# Altium PCB IMX219_Bridge.PcbDoc
Units mil, origin at the board's own origin, x right, y up, seen from the top; angles counter-clockwise.
Board outline 1639 x 1636 mil, 2 copper layers (Top Layer, Bottom Layer); 42 components, 36 nets, 198 pads, 212 vias.
Unrouted connection lines stored in the file: 2.
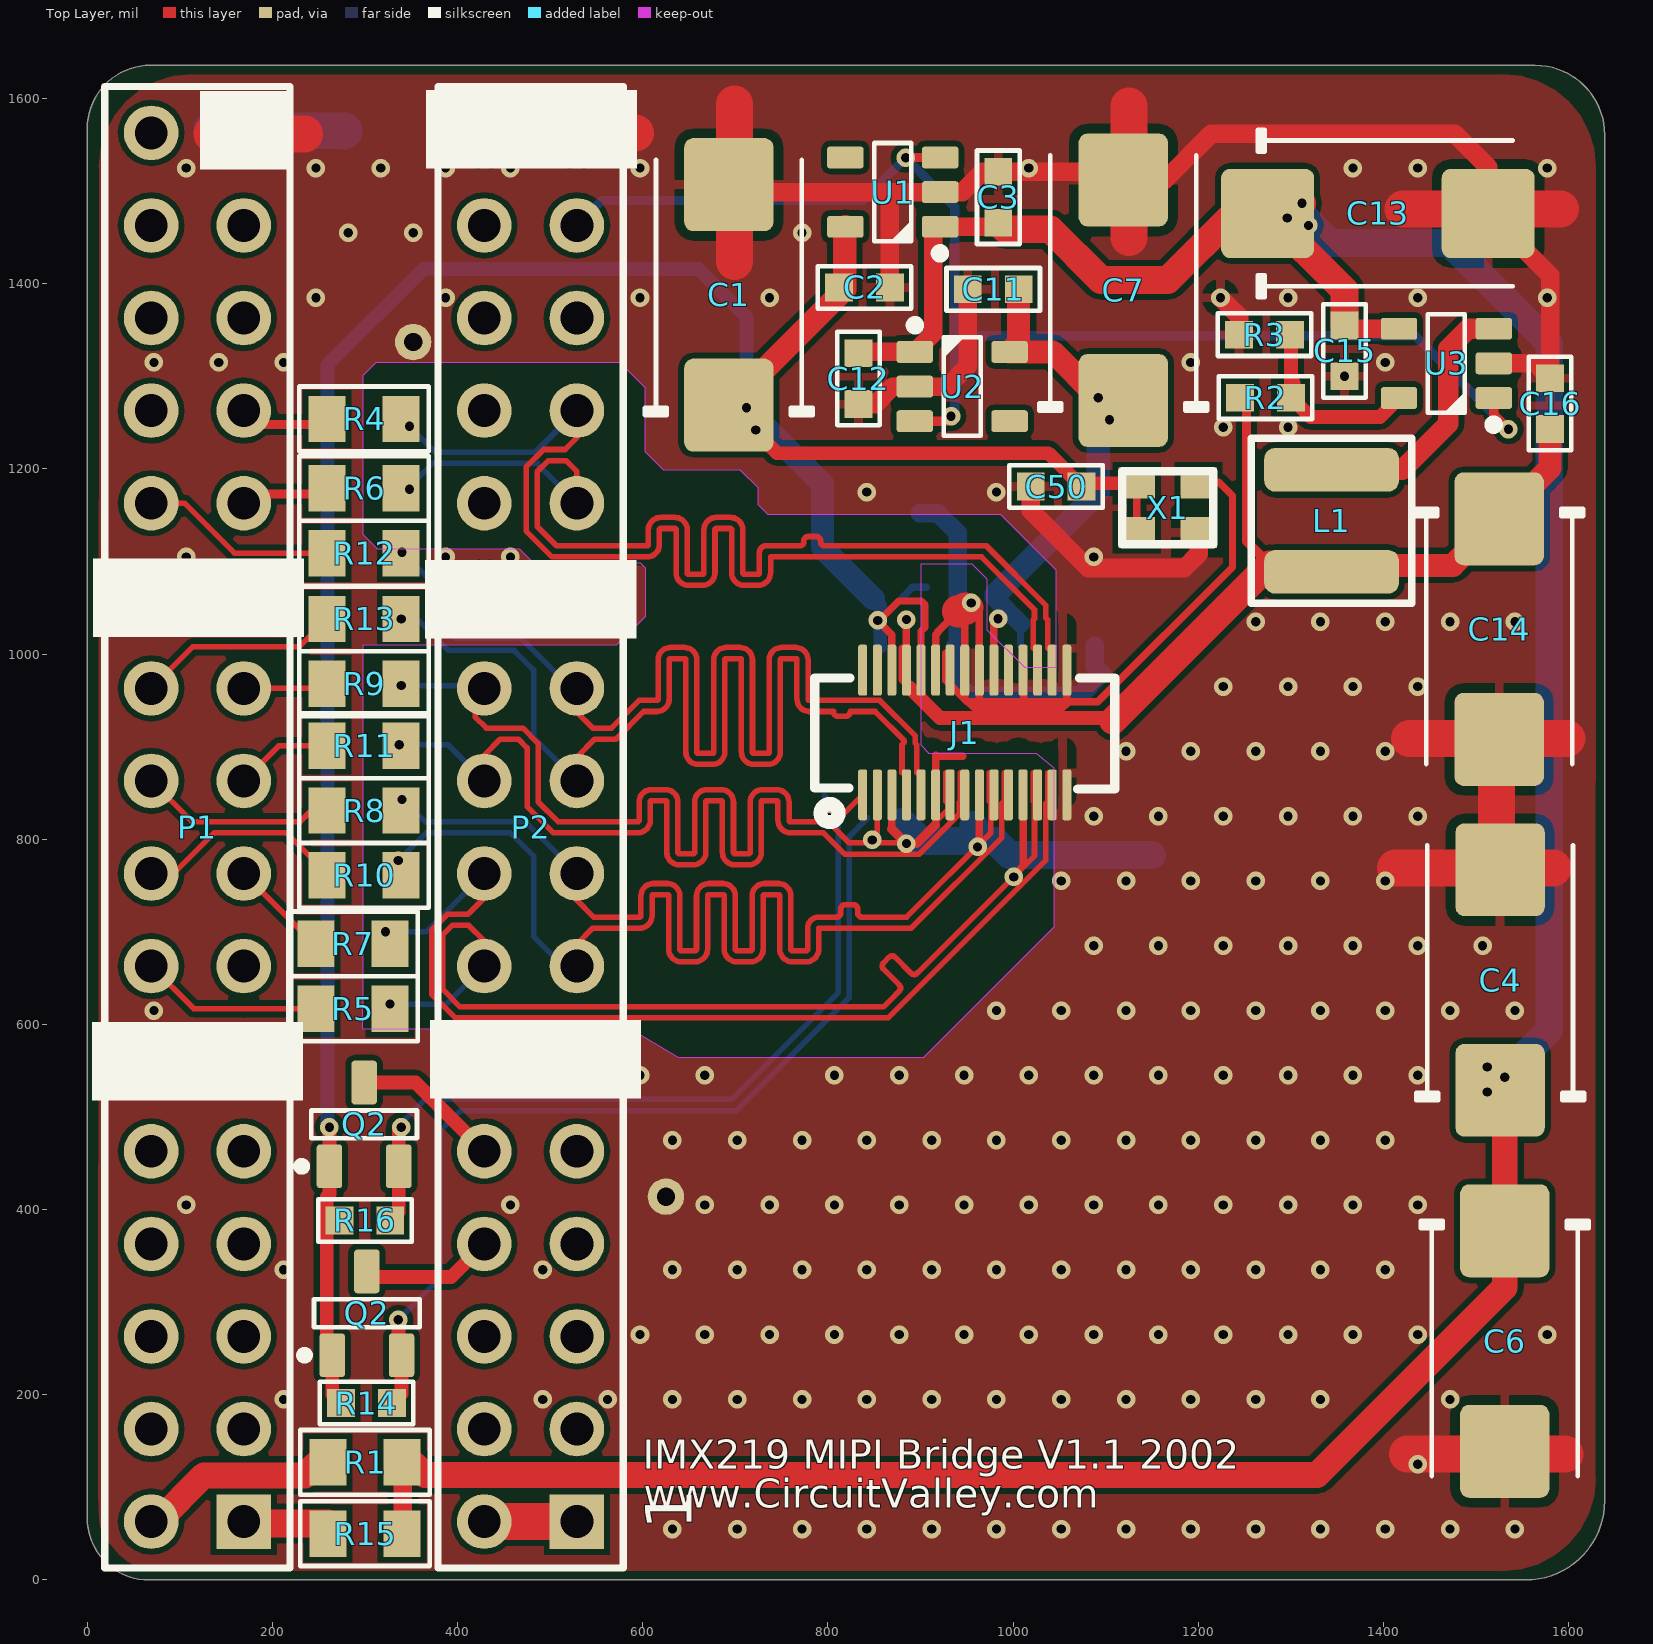
[diagram p0: Top Layer view]
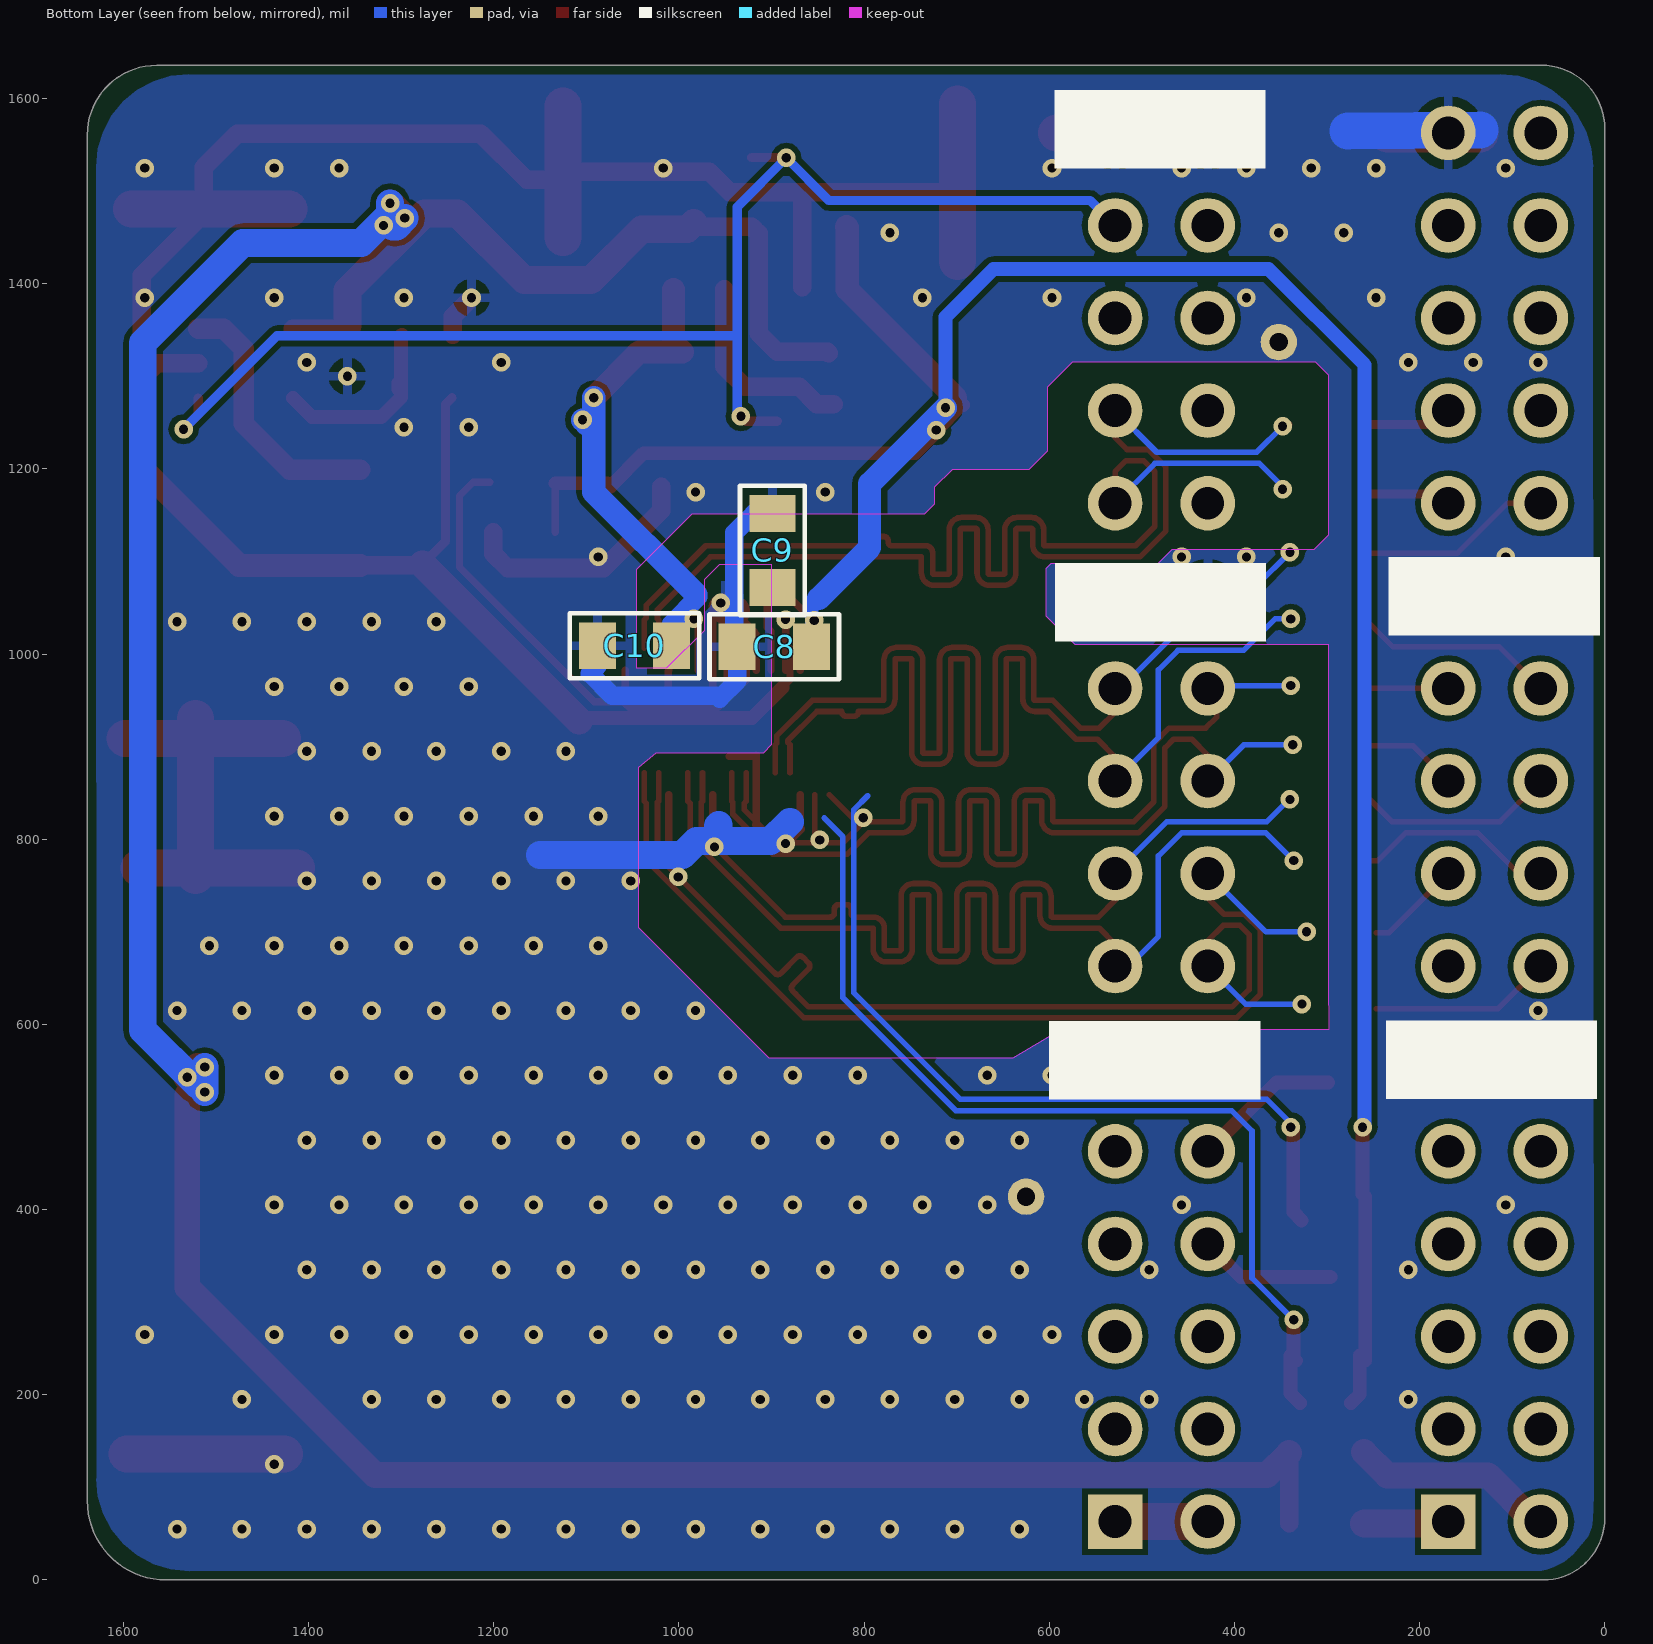
[diagram p1: Bottom Layer view, seen from below]

## Layer stack, top to bottom
Top Solder: solder mask 0.4, Solder Resist, Dk 3.5
Top Layer: signal copper 1.4
Dielectric 1: dielectric 12.6, FR-4, Dk 4.8
Bottom Layer: signal copper 1.4
Bottom Solder: solder mask 0.4, Solder Resist, Dk 3.5

## Board outline
0,66.57 0,1567.86 cw(c68.14,1567.86) 68.14,1636 1563.92,1636 cw(c1563.92,1560.92) 1639,1560.92 1639,85.36 cw(c1553.64,85.36) 1553.64,0 66.57,0 cw(c66.57,66.57)

## Design rules (kind name [scope] priority, off if disabled: settings)
Clearance [All] p1: gap=6 ignorepadtopadclearanceinfootprint=FALSE except(0: Arc-Hole Track-Hole SMDPad-Hole THPad-Hole Via-Hole Fill-Hole Poly-Hole Region-Hole Text-Hole)
DiffPairsRouting [All] p1: maxlimit=10 minlimit=6 mostfreqgap=6 toplayer_minwidth=6 toplayer_maxwidth=15 toplayer_prefwidth=6 bottomlayer_minwidth=6 bottomlayer_maxwidth=15 bottomlayer_prefwidth=6 maxuncoupledlength=500
MatchedLengths MIPI2 [InNetClass('MIPI_2S')] p1: tolerance=5 checknetsindiffpair=TRUE checkdiffpairvsdiffpair=FALSE checkxsignals=FALSE checkothers=FALSE
MatchedLengths MIPI [InNetClass('MIPI')] p2: tolerance=5 checknetsindiffpair=TRUE checkdiffpairvsdiffpair=FALSE checkxsignals=FALSE checkothers=FALSE
PolygonConnect [All] p1: connectstyle=Relief reliefconductorwidth=10 reliefentries=4 polygonreliefangle="90 Angle" airgapwidth=10
RoutingVias [All] p1: holewidth=11.81 width=24 viastyle="Through Hole" minholewidth=10 minwidth=20 maxholewidth=196.85 maxwidth=250
SolderMaskExpansion [All] p1: expansion=4 istentingtop=FALSE
Width [All] p1: maxlimit=500 minlimit=6 preferedwidth=10
29 further rules are at their usual default settings.

## Classes and differential pairs
differential pair class MIPI_DIFF: CLK D0 D1 D2 D3
net class MIPI: CLK_N CLK_P D0_N D0_P D1_N D1_P D2_N D2_P D3_N D3_P
differential pair D0: +D0_P -D0_N
differential pair D3: +D3_P -D3_N
differential pair D2: +D2_P -D2_N
differential pair D1: +D1_P -D1_N
differential pair CLK: +CLK_P -CLK_N

## Components (designator, comment, footprint, x,y, rotation, side; value= is the part's Value field where it differs from the comment)
C1 "33uf 20V D" CAPMP7343X310N 693,1388.01 r90 top
C2 "100nf" 0603C-GENERIC 867,1396 r180 top
C3 "100nf" 0603C-GENERIC 984,1521 r270 top
C4 "33uf 20V D" CAPMP7343X310N 1526,648 r90 top
C6 "33uf 20V D" CAPMP7343X310N 1531,258 r270 top
C7 "33uf 20V D" CAPMP7343X310N 1119,1393.01 r90 top
C8 "1uf" 0805C-TBD 867,1008 r0 bottom
C9 "1uf" 0805C-TBD 899,1082 r90 bottom
C10 "1uf" 0805C-TBD 1018,1009 r0 bottom
C11 "100nf" 0603C-GENERIC 951,1394 r0 top
C12 "100nf" 0603C-GENERIC 833,1270 r90 top
C13 "33uf 20V D" CAPMP7343X310N 1394,1476.01 r0 top
C14 "33uf 20V D" CAPMP7343X310N 1525,1027 r270 top
C15 "100nf" 0603C-GENERIC 1358,1300 r90 top
C16 "100nf" 0603C-GENERIC 1580,1298 r270 top
C50 "100nf" 0603C-GENERIC 1019,1181 r0 top
J1 "DF37NC-30DS-0.4V" DF37NC-30DS-0.4V 947.76,915.32 r0 top
L1 "2u2" TAIYO_NRS4018T2R2MDGJ 1344,1144 r270 top
P1 "Header 16X2" HDR2X16 169,63 r90 top
P2 "Header 16X2" HDR2X16 528.84,63.01 r90 top
Q2 "NTR5103NT1G" SOT23-3 302,288 r90 top
Q2 "NTR5103NT1G" SOT23-3 299,492 r90 top
R1 "0R" 0805R-0R1 270,127 r0 top
R2 "300K" 0603R-10K 1300,1277 r180 top
R3 "73K2" 0603R-10K 1244,1345 r0 top
R4 "50R" 0805R-0R1 269,1254 r0 top
R5 "50R" 0805R-0R1 257,617 r0 top
R6 "50R" 0805R-0R1 269,1179 r0 top
R7 "50R" 0805R-0R1 317,687 r180 top
R8 "50R" 0805R-0R1 269,831 r0 top
R9 "50R" 0805R-0R1 269,968 r0 top
R10 "50R" 0805R-0R1 269,761 r0 top
R11 "50R" 0805R-0R1 269,901 r0 top
R12 "50R" 0805R-0R1 269,1109 r0 top
R13 "50R" 0805R-0R1 269,1038 r0 top
R14 "3K3" 0603R-10K 329,191 r180 top
R15 "0R" 0805R-0R1 270,50 r0 top
R16 "3K3" 0603R-10K 272.36,388.35 r0 top
U1 "MIC550x" SOT23-5 870,1499.01 r180 top
U2 "MIC550x" SOT23-5 945,1289.01 r0 top
U3 "AP3417C" SOT23-5 1468,1314.01 r180 top
X1 "DSO221SR" "Active Oscillator 2520" 1167,1158 r0 top

## Footprints (in the part's own frame and the unit in brackets; to place one, negate y for a bottom-side part, rotate by r counter-clockwise, add the part's x,y. Pads: shape width x height; smd on the part's side, far side on the other; paste and mask are expansions set on the pad)
0603C-GENERIC [mil] "CAPACITOR 0603"
  rect 30x30 smd: 1(0,0) 2(55,0)
  silkscreen extent -23,-23 78,23, body extent -4,-15 59,15, height 19
0603R-10K [mil] "RESISTOR 0603"
  rect 30x30 smd: 1(0,0) 2(55,0)
  silkscreen extent -23,-23 78,23, body extent -4,-15 59,15, height 20
0805C-TBD [mil] "CAPACITOR 0805"
  rect 40x50 smd: 1(-10,0) 2(70,0)
  silkscreen extent -40,-35 100,35, body extent -11,-25 70,25, height 26
0805R-0R1 [mil] "RESISTOR 0805"
  rect 40x50 smd: 1(-10,0) 2(70,0)
  silkscreen extent -40,-35 100,35, body extent -11,-25 70,25, height 27
"Active Oscillator 2520" [mm]
  rect 1x0.85 smd: 1(-0.85,-0.675) 2(0.85,-0.675) 3(0.85,0.675) 4(-0.85,0.675)
  silkscreen extent -1.25,-1 1.25,1, body extent -1.25,-1 1.25,1, height 0.56
CAPMP7343X310N [mm] "Molded body capacitor, Body 7.3x4.3mm, 2917, IPC Nominal settings"
  round 1 on Mech14: 0(0,0)
  rrect20% 2.55x2.45 smd: 1(-3.025,0) 2(3.025,0)
  silkscreen extent -3.3,-2.3 3.7,2.3, body extent -3.8,-1.97 3.8,1.98, height 3.1
DF37NC-30DS-0.4V [mm] "IMX219 Camera connector"
  rrect50% 0.247x1.4 smd: 1(-2.8,-1.71) 2(-2.4,-1.71) 3(-2,-1.71) 4(-1.6,-1.71) 5(-1.2,-1.71) 6(-0.8,-1.71) 7(-0.4,-1.71) 8(0,-1.71) 9(0.4,-1.71) 10(0.8,-1.71) 11(1.2,-1.71) 12(1.6,-1.71) 13(2,-1.71) 14(2.4,-1.71) 15(2.8,-1.71) 16(2.8,1.71) 17(2.4,1.71) 18(2,1.71) 19(1.6,1.71) 20(1.2,1.71) 21(0.8,1.71) 22(0.4,1.71) 23(0,1.71) 24(-0.4,1.71) 25(-0.8,1.71) 26(-1.2,1.71) 27(-1.6,1.71) 28(-2,1.71) 29(-2.4,1.71) 30(-2.8,1.71)
  silkscreen extent -4.11,-2.46 4.11,1.5, body extent -4.11,-1.5 4.11,1.48, height 0.99
HDR2X16 [mm] "Connector; Header; 16x2 Position"
  rect 1.5x1.5 hole 0.9: 1(0,0)
  round 1.5 hole 0.9: 2(0,2.54) 3(2.54,0) 4(2.54,2.54) 5(5.08,0) 6(5.08,2.54) 7(7.62,0) 8(7.62,2.54) 9(10.16,0) 10(10.16,2.54) 11(12.7,0) 12(12.7,2.54) 13(15.24,0) 14(15.24,2.54) 15(17.78,0) 16(17.78,2.54) 17(20.32,0) 18(20.32,2.54) 19(22.86,0) 20(22.86,2.54) 21(25.4,0) 22(25.4,2.54) 23(27.94,0) 24(27.94,2.54) 25(30.48,0) 26(30.48,2.54) 27(33.02,0) 28(33.02,2.54) 29(35.56,0) 30(35.56,2.54) 31(38.1,0) 32(38.1,2.54)
  silkscreen extent -1.27,-1.27 39.37,3.81
SOT23-3 [mm] "SOT23, 3 pin"
  round 0.5 on Mech14: 0(0,0)
  rrect25% 1.2x0.7 smd: 1(-1.15,0.95) 2(-1.15,-0.95) 3(1.15,0)
  silkscreen extent -1.25,-1.45 0.38,1.81, body extent -1.4,-1.45 1.4,1.45, height 1.29
SOT23-5 [mm]
  round 0.5 on Mech14: 0(0,0)
  rrect25% 1x0.6 smd: 1(-1.3,0.95) 2(-1.3,0) 3(-1.3,-0.95) 4(1.3,-0.95) 5(1.3,0.95)
  silkscreen extent -1.42,-1.35 0.51,1.81, body extent -1.4,-1.45 1.4,1.45, height 1.44
TAIYO_NRS4018T2R2MDGJ [mm] "TAIYO"
  rrect50% 1.2x3.7 smd: 1(-1.4,0) 2(1.4,0)
  silkscreen extent -2.26,-2.2 2.26,2.2, body extent -1.5,-1.5 1.5,1.5, height 1.35

## Part data
C1 C4 C6 C7 C13 C14: library part CAPT_330u_2917_6V3, "Capacitor SMD Tant 330uF 20% 6V3 2917"
C2 C3 C11 C12 C15 C16 C50: library part 0603C-10UF-6V3-X5R-MUR, "CAPACITOR 0603 CERAMIC"
C8 C9 C10: library part 0805C-TBD, "CAPACITOR 0805 CERAMIC VALUE TO BE DETERMINED"
J1: library part 30_Pin_Dual
L1: library part inductor_smd
P1 P2: "Header, 16-Pin, Dual row"
Q2 Q2: library part MOSFET_BSS123, "MOSFET SMD N-CH 100V 170mA SOT23-3"
R1 R4 R5 R6 R7 R8 R9 R10 R11 R12 R13 R15: library part 0805R-0R1, "RESISTOR 0805 1 WATT"
R2 R3 R14 R16: library part 0603R-10K, "GENERIC RESISTOR 0603"
X1: library part Oscillator_2520, "Active Oscillator_2520"

## Free pads (board coordinates)
  round 39.37 hole 19.68 unplated: 1(352,1337) 1(625,414)

## Via types
v1: diameter 20, hole 10, Top Layer to Bottom Layer, tented both sides, 212 vias

## Nets (pads, with @x,y where several pads share a name; then routed paths per layer and width w, separated by ;. In a path a pad name is that pad's centre, name@x,y a point inside that pad or via, vN(x,y) a via of type N, cw(c..) or ccw(c..) an arc to the next point about the centre after c; other vN are vias at no path point)
1V2: C9.1 C14.1 C16.2 J1.27 L1.2 R2.2 | length 1187.6
  Top Layer w8: J1.27@880.01,1006.33 880.01,971.99 J1.27@888,964 ; J1.27 v1(884.77,1037.32)
  Top Layer w10: R2.2 1252,1270 1252,1122 L1.2@1277,1097
  Top Layer w15: J1.27@888,964 921,931 1105,931 1108,928
  Top Layer w20: L1.2@1275.89,1095.89 L1.2@1344,1095.89
  Top Layer w25: L1.2@1344,1095.89 1474.8,1095.89 C14.1 1580,1201.09 C16.2
  Top Layer w30: 1108,928 L1.2@1277,1097
  Bottom Layer w8: C9.1@880.01,1061.01 891,1072 C9.1@906,1072
1V8: C1.1 C2.2 C8.1 C50.2 J1.26 J1.28 Q2.1 R14.2 R16.1 U1.5 X1.1 X1.4 | length 3025
  Top Layer w8: J1.28 869.02,1021.06 v1(853.76,1036.31) 855.48,1036.31 876.49,1057.32 900.76,1057.32 904.77,1053.31 904.77,1029.04 900.52,1024.79 J1.26 ; X1.1 X1.4
  Top Layer w15: Q2.1@258.6,236.72 258.6,413.72 261.6,416.72 261.6,446.72 v1(261.6,489) ; Q2.1@264.6,242.72 264.6,200.4 R14.2 ; C1.1 695.09,1268.91 v1(722,1242) ; C1.1@720.96,1240.96 744.91,1217 1038,1217 C50.2 1077.57,1184.57 X1.4
  Top Layer w25: C1.1@701.04,1276.96 818.09,1394.01 818.09,1460.88 U1.5
  Bottom Layer w15: v1@259.6,489 259.6,1312.6 363,1416 660,1416 712,1364 v1(712,1266) ; 849,1060 856.51,1052.49 856.51,1008.49 C8.1
  Bottom Layer w25: v1(712,1266) 794,1184 794,1115 849,1060
2V8: C7.1 C10.1 C11.2 J1.21 U2.5 | length 625.3
  Top Layer w8: J1.21 979.26,1033.81 v1(983.76,1038.31)
  Top Layer w25: C11.2 1006,1336.23 U2.5 1042.59,1326.41 v1(1092,1277)
  Bottom Layer w8: 981.5,1064.5 1008,1038 1008,1033 C10.1
  Bottom Layer w20: 979,1062 C10.1@1008,1033
  Bottom Layer w25: 981.5,1064.5 1092,1175 1092,1248 ; v1(1092,1277) 1092,1248 ; v1(1104,1253) 1099,1248 1092,1248
CLK_N: J1.5 P2.19 R12.2 | length 1272.9
  Top Layer w6: R12.2 v1(340,1110) ; P2.19 528.84,937.16 545.99,920.01 566.03,920.01 596.03,950.01 615.01,950.01 ccw(c615.01,951.51) 616.51,951.51 616.51,993.71 cw(c630.01,993.71) 630.01,1007.21 645.01,1007.21 cw(c645.01,993.71) 658.51,993.71 658.51,894.31 ccw(c660.01,894.31) 660.01,892.81 675.01,892.81 ccw(c675.01,894.31) 676.51,894.31 676.51,993.71 cw(c690.01,993.71) 690.01,1007.21 705.01,1007.21 cw(c705.01,993.71) 718.51,993.71 718.51,894.31 ccw(c720.01,894.31) 720.01,892.81 735.01,892.81 ccw(c735.01,894.31) 736.51,894.31 736.51,993.71 cw(c750.01,993.71) 750.01,1007.21 765.01,1007.21 cw(c765.01,993.71) 778.51,993.71 778.51,951.51 ccw(c780.01,951.51) 780.01,950.01 855.99,950.01 894.38,911.62 894.38,903.62 895.76,902.24 J1.5@895.76,871.69
  Bottom Layer w6: v1(340,1110) 376,1074 376,1038 397,1017 469,1017 522.99,963.01 P2.19
CLK_P: J1.4 P2.17 R13.2 | length 1311.5
  Top Layer w6: P2.17 528.84,888.85 548,908.01 571,908.01 601,938.01 615.01,938.01 ccw(c615.01,951.51) 628.51,951.51 628.51,993.71 cw(c630.01,993.71) 630.01,995.21 645.01,995.21 cw(c645.01,993.71) 646.51,993.71 646.51,894.31 ccw(c660.01,894.31) 660.01,880.81 675.01,880.81 ccw(c675.01,894.31) 688.51,894.31 688.51,993.71 cw(c690.01,993.71) 690.01,995.21 705.01,995.21 cw(c705.01,993.71) 706.51,993.71 706.51,894.31 ccw(c720.01,894.31) 720.01,880.81 735.01,880.81 ccw(c735.01,894.31) 748.51,894.31 748.51,993.71 cw(c750.01,993.71) 750.01,995.21 765.01,995.21 cw(c765.01,993.71) 766.51,993.71 766.51,951.51 ccw(c780.01,951.51) 780.01,938.01 804,938.01 806,938.01 806,937.51 ccw(c810.5,937.51) 810.5,933.01 819.5,933.01 ccw(c819.5,937.51) 824,937.51 824,938.01 833,938.01 851.02,938.01 882.38,906.65 882.38,904.62 880.01,902.24 J1.4@880.01,871.69
  Bottom Layer w6: v1(339,1038) 356,1038 390,1004 461,1004 482,983 482,909.85 P2.17 P2.17@528.84,881.16
D0_N: J1.8 P2.18 R11.2 | length 1116.9
  Top Layer w6: v1(337,902) 338,902 R11.2 ; P2.18 428.84,890.85 446,908.01 465.59,908.01 475,898.59 475,835.59 503.59,807.01 594.5,807.01 ccw(c594.5,820.51) 608,820.51 608,840.12 cw(c609.5,840.12) 609.5,841.62 624.5,841.62 cw(c624.5,840.12) 626,840.12 626,785.9 ccw(c639.5,785.9) 639.5,772.4 654.5,772.4 ccw(c654.5,785.9) 668,785.9 668,840.12 cw(c669.5,840.12) 669.5,841.62 684.5,841.62 cw(c684.5,840.12) 686,840.12 686,785.9 ccw(c699.5,785.9) 699.5,772.4 714.5,772.4 ccw(c714.5,785.9) 728,785.9 728,840.12 cw(c729.5,840.12) 729.5,841.62 744.5,841.62 cw(c744.5,840.12) 746,840.12 746,820.51 ccw(c759.5,820.51) 759.5,807.01 795.03,807.01 818.03,784.01 898.6,784.01 941.63,827.04 941.63,839.75 943,841.13 J1.8@943,871.69
  Bottom Layer w6: v1(337,902) 389.85,902 P2.18
D0_P: J1.7 P2.20 R9.2 | length 1095.1
  Top Layer w6: v1(339,966) R9.2 ; P2.20 419,953.17 419,932 430.99,920.01 470.56,920.01 487,903.56 487,840.56 508.56,819.01 594.5,819.01 ccw(c594.5,820.51) 596,820.51 596,840.12 cw(c609.5,840.12) 609.5,853.62 624.5,853.62 cw(c624.5,840.12) 638,840.12 638,785.9 ccw(c639.5,785.9) 639.5,784.4 654.5,784.4 ccw(c654.5,785.9) 656,785.9 656,840.12 cw(c669.5,840.12) 669.5,853.62 684.5,853.62 cw(c684.5,840.12) 698,840.12 698,785.9 ccw(c699.5,785.9) 699.5,784.4 714.5,784.4 ccw(c714.5,785.9) 716,785.9 716,840.12 cw(c729.5,840.12) 729.5,853.62 744.5,853.62 cw(c744.5,840.12) 758,840.12 758,820.51 ccw(c759.5,820.51) 759.5,819.01 800,819.01 823,796.01 893.63,796.01 929.63,832.01 929.63,838.75 927.25,841.13 J1.7@927.25,871.69
  Bottom Layer w6: v1(339,966) 425.85,966 P2.20
D1_N: J1.11 P2.13 R10.2 | length 1310.5
  Top Layer w6: v1(336,777) R10.2@339,777 ; P2.13 528.84,686.85 546,704.01 596.5,704.01 ccw(c596.5,717.51) 610,717.51 610,738.74 cw(c611.5,738.74) 611.5,740.24 626.5,740.24 cw(c626.5,738.74) 628,738.74 628,681.28 ccw(c641.5,681.28) 641.5,667.78 656.5,667.78 ccw(c656.5,681.28) 670,681.28 670,738.74 cw(c671.5,738.74) 671.5,740.24 686.5,740.24 cw(c686.5,738.74) 688,738.74 688,681.28 ccw(c701.5,681.28) 701.5,667.78 716.5,667.78 ccw(c716.5,681.28) 730,681.28 730,738.74 cw(c731.5,738.74) 731.5,740.24 746.5,740.24 cw(c746.5,738.74) 748,738.74 748,681.28 ccw(c761.5,681.28) 761.5,667.78 776.5,667.78 ccw(c776.5,681.28) 790,681.28 790,704.01 890,704.01 987.87,801.88 987.87,838.75 990.24,841.13 J1.11@990.24,871.69
  Bottom Layer w6: v1(336,777) 366,807 457,807 482,782 482,695 513.99,663.01 P2.13
D1_P: J1.10 P2.15 R8.2 | length 1228.5
  Top Layer w6: P2.15 528.84,734.17 547,716.01 596.5,716.01 ccw(c596.5,717.51) 598,717.51 598,738.74 cw(c611.5,738.74) 611.5,752.24 626.5,752.24 cw(c626.5,738.74) 640,738.74 640,681.28 ccw(c641.5,681.28) 641.5,679.78 656.5,679.78 ccw(c656.5,681.28) 658,681.28 658,738.74 cw(c671.5,738.74) 671.5,752.24 686.5,752.24 cw(c686.5,738.74) 700,738.74 700,681.28 ccw(c701.5,681.28) 701.5,679.78 716.5,679.78 ccw(c716.5,681.28) 718,681.28 718,738.74 cw(c731.5,738.74) 731.5,752.24 746.5,752.24 cw(c746.5,738.74) 760,738.74 760,681.28 ccw(c761.5,681.28) 761.5,679.78 776.5,679.78 ccw(c776.5,681.28) 778,681.28 778,704.01 cw(c790,704.01) 790,716.01 805,716.01 809.5,716.01 ccw(c809.5,720.51) 814,720.51 814,724.84 cw(c818.5,724.84) 818.5,729.34 827.5,729.34 cw(c827.5,724.84) 832,724.84 832,720.51 ccw(c836.5,720.51) 836.5,716.01 862,716.01 885.03,716.01 975.87,806.85 975.87,839.75 974.5,841.13 J1.10@974.5,871.69
  Bottom Layer w6: v1(340,843) 341,843 365,819 472.85,819 P2.15 P2.15@517.99,763.01
D2_N: J1.14 P2.16 R7.1 | length 1148.3
  Top Layer w6: v1(322,700) 325,700 327,702 327,700 R7.1@327,699 ; P2.16 428.84,736.85 411,719.01 389.03,719.01 372,701.98 372,632.59 397.59,607.01 865,607.01 1035.11,777.12 1035.11,838.75 1037.49,841.13 J1.14@1037.49,871.69
  Bottom Layer w6: v1(322,700) 365.83,700 P2.16
D2_P: J1.13 P2.14 R5.2 | length 1128.4
  Top Layer w6: v1(327,622) R5.2@327,625 ; P2.14 428.84,690.17 412,707.01 394,707.01 384,697.01 384,637.56 402.56,619.01 860.03,619.01 874.01,632.99 877.19,636.17 ccw(c874.01,639.35) 877.19,642.54 859.8,659.93 cw(c862.98,663.11) 859.8,666.29 866.16,672.66 cw(c869.34,669.48) 872.53,672.66 889.92,655.26 ccw(c893.1,658.45) 896.28,655.26 900.01,658.99 1023.11,782.09 1023.11,839.75 1021.74,841.13 J1.13@1021.74,871.69
  Bottom Layer w6: v1(327,622) 387.83,622 P2.14
D3_N: J1.17 P2.23 R6.2 | length 1218.1
  Top Layer w6: P2.23 528.84,1197.17 517,1209.01 498,1209.01 486,1197.01 486,1138.01 507,1117.01 604.5,1117.01 ccw(c604.5,1118.51) 606,1118.51 606,1134.19 cw(c619.5,1134.19) 619.5,1147.69 634.5,1147.69 cw(c634.5,1134.19) 648,1134.19 648,1087.83 ccw(c649.5,1087.83) 649.5,1086.33 664.5,1086.33 ccw(c664.5,1087.83) 666,1087.83 666,1134.19 cw(c679.5,1134.19) 679.5,1147.69 694.5,1147.69 cw(c694.5,1134.19) 708,1134.19 708,1087.83 ccw(c709.5,1087.83) 709.5,1086.33 724.5,1086.33 ccw(c724.5,1087.83) 726,1087.83 726,1110.01 cw(c733,1110.01) 733,1117.01 765,1117.01 769.5,1117.01 ccw(c769.5,1121.51) 774,1121.51 774,1122.51 cw(c778.5,1122.51) 778.5,1127.01 787.5,1127.01 cw(c787.5,1122.51) 792,1122.51 792,1121.51 ccw(c796.5,1121.51) 796.5,1117.01 802,1117.01 971,1117.01 1035.11,1052.89 1035.11,1039.26 1037.49,1036.89 J1.17@1037.49,1006.33
  Bottom Layer w6: v1(348,1178) 348,1181 373,1206 485.85,1206 P2.23
D3_P: J1.18 P2.25 R4.2 | length 1226.5
  Top Layer w6: R4.2@340,1248 346,1248 v1(348,1246) ; P2.25 528.84,1233.85 516,1221.01 493.03,1221.01 474,1201.98 474,1133.04 502.03,1105.01 604.5,1105.01 ccw(c604.5,1118.51) 618,1118.51 618,1134.19 cw(c619.5,1134.19) 619.5,1135.69 634.5,1135.69 cw(c634.5,1134.19) 636,1134.19 636,1087.83 ccw(c649.5,1087.83) 649.5,1074.33 664.5,1074.33 ccw(c664.5,1087.83) 678,1087.83 678,1134.19 cw(c679.5,1134.19) 679.5,1135.69 694.5,1135.69 cw(c694.5,1134.19) 696,1134.19 696,1087.83 ccw(c709.5,1087.83) 709.5,1074.33 724.5,1074.33 ccw(c724.5,1087.83) 738,1087.83 738,1105.01 966.03,1105.01 1023.11,1047.92 1023.11,1038.26 1021.74,1036.89 J1.18@1021.74,1006.33
  Bottom Layer w6: v1(348,1246) 376,1218 483.83,1218 P2.25
EN: P2.29 U1.3 U2.3 U3.1 | length 1446.8
  Top Layer w10: v1(884,1536) 884.41,1536.41 U1.3 ; U2.3 927.61,1251.61 v1(933,1257) ; U3.1 1519.18,1258.82 v1(1535,1243)
  Bottom Layer w10: P2.29 555.83,1490 838,1490 v1(884,1536) 937,1483 937,1261 v1(933,1257) ; 937,1344 1434,1344 v1(1535,1243)
GND: C1.2 C2.1 C3.1 C4.2 C6.2 C7.2 C8.2 C9.2 C10.2 C11.1 C12.1 C13.2 C14.2 C15.1 C16.1 C50.1 J1.3 J1.6 J1.9 J1.12 J1.15 J1.16 J1.19 J1.22 J1.23 J1.25 P1.11 P1.12 P1.21 P1.22 P1.31 P2.11 P2.12 P2.21 P2.22 P2.31 P2.32 pad.1 R3.1 U1.2 U2.2 U3.2 X1.2 | length 6331.9
  Top Layer w8: 869.02,811.06 J1.3 ; v1(884.76,795.31) 895.76,795.31 ; 916.27,815.82 J1.6 916.27,890.81 917.26,889.81 945.76,889.81 ; J1.25 916.27,1020.74 918.77,1023.24 918.77,1024.32 940.76,1046.31 945.76,1046.31 v1(954.76,1055.31) 963.51,1046.57 J1.22 963.51,944.06 ; 947.76,1031.31 J1.23 947.76,952.11 957.16,942.71 1014.36,942.71 ; v1(961.63,791.73) 963.51,793.6 J1.9 ; 963.51,942.71 1014.36,942.71 ; v1(1000.76,759.31) 1000.76,761.31 1010.76,771.31 J1.12 ; J1.19 1011.64,981.76 1011.64,945.44 1014.36,942.71 ; J1.16 1058,946.55 1053.76,942.31 1026.76,942.31 1026.36,942.71 1014.36,942.71
  Top Layer w10: 869.02,811.06 v1(884.76,795.31) ; 895.76,795.31 916.27,815.82
  Top Layer w20: C1.2 701.09,1499.01 867,1499.01 ; C12.1 851,1270 870.01,1289.01 U2.2 929.01,1289.01 951,1311 C11.1 ; C2.1 867,1499.01 ; C50.1 1019,1155 1081,1093 1185,1093 1200.46,1108.46 X1.2 ; v1(1224,1385) 1244,1365 R3.1 ; U3.2 1563.99,1314.01 C16.1 1580,1409.1 C13.2 1513.09,1525.91 1477,1562 1214,1562 1164.1,1512.1 C7.2 1110.1,1521 C3.1 967,1521 945.01,1499.01 U1.2 867,1499.01
  Top Layer w30: v1@948.26,1048.81 v1@952.76,1050.31
  Top Layer w35: 940.76,1046.31 v1@948.26,1048.81
  Top Layer w40: 34,1065.01 204,1065.01 ; P1.12@41,562.01 P1.11@194,562.01 ; 134.84,1562.01 234.84,1562.01 ; 390.5,1573.33 400.82,1563.01 P2.32 579,1561 592,1563.01 ; 394,564.01 568,564.01 ; 397,1063.01 561,1063.01 ; 698.99,1424 698.99,1594 ; 1124.99,1450.1 1124.99,1592 ; 1413,769.01 1583,769.01 ; 1421,1481.01 1591,1481.01 ; 1426,136.01 1596,136.01 ; 1428,909.01 1598,909.01 ; C4.2@1521.99,760.68 C14.2@1521.99,930.68
  Bottom Layer w20: C9.2 919,1152 940,1131 940,1008 C8.2 937,971 956,952 959,955 1072,955 1096,979 1088,987 C10.2
  Bottom Layer w30: 880,819 901,798 v1@956.87,798 ; 956.87,815.41 958,814.28 958,798 981,798 996,783 1150,783
  Bottom Layer w40: 32.53,563.07 203,562 ; 38.53,1061.07 209,1060 ; 134.74,1566.07 277.21,1565.01 ; 395.53,562.07 566,561 ; P2.32@405.53,1564.07 P2.31@505.53,1564.07
  other v1: 632,55 702,55 772,55 842,55 912,55 982,55 1052,55 1122,55 1192,55 1262,55 1332,55 1402,55 1472,55 1542,55 1437,125 212,195 492,195 562,195 632,195 702,195 772,195 842,195 912,195 982,195 1052,195 1122,195 1192,195 1262,195 1332,195 1472,195 597,265 667,265 737,265 807,265 877,265 947,265 1017,265 1087,265 1157,265 1227,265 1297,265 1367,265 1437,265 1577,265 212,335 492,335 632,335 702,335 772,335 842,335 912,335 982,335 1052,335 1122,335 1192,335 1262,335 1332,335 1402,335 107,405 457,405 667,405 737,405 807,405 877,405 947,405 1017,405 1087,405 1157,405 1227,405 1297,405 1367,405 1437,405 632,475 702,475 772,475 842,475 912,475 982,475 1052,475 1122,475 1192,475 1262,475 1332,475 1402,475 387,545 597,545 667,545 807,545 877,545 947,545 1017,545 1087,545 1157,545 1227,545 1297,545 1367,545 1437,545 72,615 982,615 1052,615 1122,615 1192,615 1262,615 1332,615 1402,615 1472,615 1542,615 1087,685 1157,685 1227,685 1297,685 1367,685 1437,685 1507,685 1052,755 1122,755 1192,755 1262,755 1332,755 1402,755 1087,825 1157,825 1227,825 1297,825 1367,825 1437,825 1122,895 1192,895 1262,895 1332,895 1402,895 1227,965 1297,965 1367,965 1437,965 212,1035 492,1035 1262,1035 1332,1035 1402,1035 1472,1035 1542,1035 107,1105 387,1105 457,1105 1087,1105 842,1175 982,1175 1227,1245 1297,1245 1358,1300 72,1315 142,1315 212,1315 1192,1315 1402,1315 247,1385 387,1385 597,1385 737,1385 1297,1385 1437,1385 1577,1385 282,1455 352,1455 772,1455 107,1525 247,1525 317,1525 387,1525 457,1525 597,1525 1017,1525 1367,1525 1437,1525 1577,1525
MCLK: J1.24 X1.3 | length 524.5
  Top Layer w8: J1.24@927.25,1001 927.25,971.75 950.5,948.5 1091.5,948.5 1237,1094 1237,1171 1222.43,1185.57 X1.3@1204.46,1185.57
NetL1_1: L1.1 U3.3 | length 285.7
  Top Layer w22: L1.1 1420.12,1199.12 1470,1249 1470,1330 1491.41,1351.41 U3.3
NetP1_14: P1.14 R5.1 | length 207.1
  Top Layer w6: P1.14@79,663 P1.14 115,617 R5.1
NetP1_15: P1.15 R7.2 | length 104.5
  Top Layer w6: P1.15 233,699 R7.2@247,699
NetP1_16: P1.16 R10.1 | length 220.7
  Top Layer w6: P1.16 93,763 137,807 215,807 245,777 R10.1@259,777
NetP1_17: P1.17 R11.1 | length 105.7
  Top Layer w6: P1.17 207,901 R11.1
NetP1_18: P1.18 R8.1 | length 218.8
  Top Layer w6: P1.18 113,819 230,819 R8.1@258,847
NetP1_19: P1.19 R9.1 | length 92.1
  Top Layer w6: P1.19 254,963 R9.1
NetP1_20: P1.20 R13.1 | length 237.1
  Top Layer w6: P1.20@69,979 P1.20 114,1008 229,1008 R13.1
NetP1_23: P1.23 R6.1 | length 95.1
  Top Layer w10: P1.23 179,1173 R6.1@260,1173
NetP1_24: P1.24 R12.1 | length 212.4
  Top Layer w6: P1.24 105,1163 159,1109 R12.1
NetP1_25: P1.25 R4.1 | length 97.2
  Top Layer w10: P1.25 184,1248 R4.1@260,1248
NetR2_1: R2.1 R3.2 U3.5 | length 209.5
  Top Layer w15: R3.2 1300,1344 R2.1 1321,1256 1396.21,1256 U3.5 ; R2.1@1303,1286 1303,1293.01
SCL: P2.8 Q2.3@302,333.28 | length 147.6
  Top Layer w15: Q2.3@296,327.28 393.11,327.28 P2.8
SCL_1V8: J1.2 Q2.2@339.4,242.72 R14.1 | length 1078.9
  Top Layer w6: v1(847.76,799.31) 853.28,804.83 J1.2
  Top Layer w15: R14.1 339.4,201.4 Q2.2@339.4,242.72 ; Q2.2@333.4,236.72 336,239.32 v1(336,281)
  Bottom Layer w6: v1(336,281) 381,326 381,485 403,507 700.97,507 823,629.03 823,803 843,823
SDA: P2.10 Q2.3@299,537.28 | length 160.6
  Top Layer w15: Q2.3@299,537.28 354.57,537.28 P2.10
SDA_1V8: J1.1 Q2.2@336.4,446.72 R16.2 | length 906.1
  Top Layer w6: v1(800.76,823.31) 812.84,823.31 J1.1
  Top Layer w15: R16.2 336.4,397.39 336.4,446.72 336.4,486.4 v1(339,489)
  Bottom Layer w6: v1(339,489) 339,493 365,519 696,519 811,634 811,832 796,847
VCC_3.3: C3.2 C4.1 C6.1 C12.2 C13.1 C15.2 R1.2 R15.2 U1.1 U2.1 U3.4 | length 3655.1
  Top Layer w20: R15.2@341,61 R1.2@341,137 ; C12.2@838,1325.01 839.4,1326.41 U2.1 914,1346.59 914,1454.43 U1.1 C3.2@984,1461.61 ; C15.2 1361.59,1351.41 U3.4
  Top Layer w28: R1.2@341,137 364.52,113.48 1328.48,113.48 1531,316 C6.1 1531,523.91 C4.1
  Top Layer w30: C3.2 991,1459 1040,1459 1095,1404 1167,1404 1239.01,1476.01 C13.1 1358,1392.91 C15.2 ; v1(1296,1471) v1(1312,1487) ; v1(1512,554) 1520,554 v1(1531,543)
  Bottom Layer w30: v1(1296,1471) 1305,1462 1309,1462 ; v1(1312,1487) 1312,1475 1343,1444 1471,1444 1579,1336 1579,594 1519.5,534.5 ; v1(1512,527) v1(1512,554)
  other v1: 1319,1463
VIO2: P2.1 P2.2 | length 100
  Top Layer w40: P2.2 P2.1
VIO3: P1.2 R1.1 | length 222.1
  Top Layer w28: P1.2 76,63 126,113 235,113 R1.1@260,138
VIO5: P1.1 R15.1 | length 91.8
  Top Layer w30: P1.1 171,61 R15.1@260,61
pads on no net: C1.0 C4.0 C6.0 C7.0 C13.0 C14.0 J1.20 J1.29 J1.30 P1.3 P1.4 P1.5 P1.6 P1.7 P1.8 P1.9 P1.10 P1.13 P1.26 P1.27 P1.28 P1.29 P1.30 P1.32 P2.3 P2.4 P2.5 P2.6 P2.7 P2.9 P2.24 P2.26 P2.27 P2.28 P2.30 Q2.0 U1.0 U1.4 U2.0 U2.4 U3.0

## Polygon pours and split planes (outlines as drawn)
GND on Bottom Layer "Top-GND" (solid, remove dead copper, pour order 3): 355,10 1529,10 ccw(c1529,110) 1629,110 1629,197 1629,1526 ccw(c1529,1526) 1529,1626 1449,1626 113,1626 ccw(c113,1526) 13,1526 12,91 13,65 ccw(c52.09,67.19) 26,38 ccw(c80.8,74.7) 68,10 355,10 354,10
GND on Top Layer "Top-GND" (solid, remove dead copper, pour order 4): 355,10 1529,10 ccw(c1529,110) 1629,110 1629,197 1629,1526 ccw(c1529,1526) 1529,1626 1449,1626 113,1626 ccw(c113,1526) 13,1526 12,91 13,65 ccw(c52.09,67.19) 26,38 ccw(c80.8,74.7) 68,10 355,10 354,10

## Keep-outs
Keep-Out Layer:
  pour cut-out: 587,595 297.44,595 298,646 298,1010 572,1010 603,1041 603,1093 598,1098 482,1098 467,1113 314,1113 298,1129 298,1301 312,1315 575,1315 602,1288 602,1219 622,1199 705,1199 724,1180 724,1162 735,1151 751,1151 986,1151 1046,1091 1046,985 1013,985 972,1026 972,1081 956,1097 900,1097 900,902 909,893 1001,893 1025,893 1044,877 1044,705 903,564 638.67,564

## Silkscreen, mask and mechanical layers (free items; w line width, h text height)
Top Overlay:
  rectangle: 122,1523.22 218,1608
  rectangle: 122,1523.22 218,1608
  rectangle: 370,520 598,604.78
  rectangle: 5,517.74 233,602.52
  rectangle: 6,1018.74 234,1103.52
  rectangle: 366,1524.74 594,1609.52
  rectangle: 365,1016.74 593,1101.52
  text "IMX219 MIPI Bridge V1.1 2002" at 600,120 h31
  text "www.CircuitValley.com" at 601,78 h31
Bottom Overlay:
  region: 594.31,1609.05 366.31,1609.05 366.31,1524.26 594.31,1524.26
  region: 233.31,1105.05 5.31,1105.05 5.31,1020.26 233.31,1020.26
  region: 593.8,1098.54 365.8,1098.54 365.8,1013.76 593.8,1013.76
  region: 600,603.78 372,603.78 372,519 600,519
  region: 236.31,604.05 8.31,604.05 8.31,519.26 236.31,519.26
Mechanical 1:
  lines w1: 0,66.57 ccw(c66.57,66.57) 66.57,0 1553.64,0 ccw(c1553.64,85.36) 1639,85.36 1639,1560.92 ccw(c1563.92,1560.92) 1563.92,1636 68.14,1636 ccw(c68.14,1567.86) 0,1567.86 0,98 0,66.57

## Text inside footprints (layer, text, board x,y; h text height)
P2: Top Overlay "1" at 653,54 h50 r90